# Altium PCB PCB1siste2.PcbDoc
Units mm, origin at the board's own origin, x right, y up, seen from the top; angles counter-clockwise.
Board outline 100.08 x 114.17 mm, 2 copper layers (Top Layer, Bottom Layer); 66 components, 150 nets, 492 pads, 0 vias.
Unrouted connection lines stored in the file: 264.
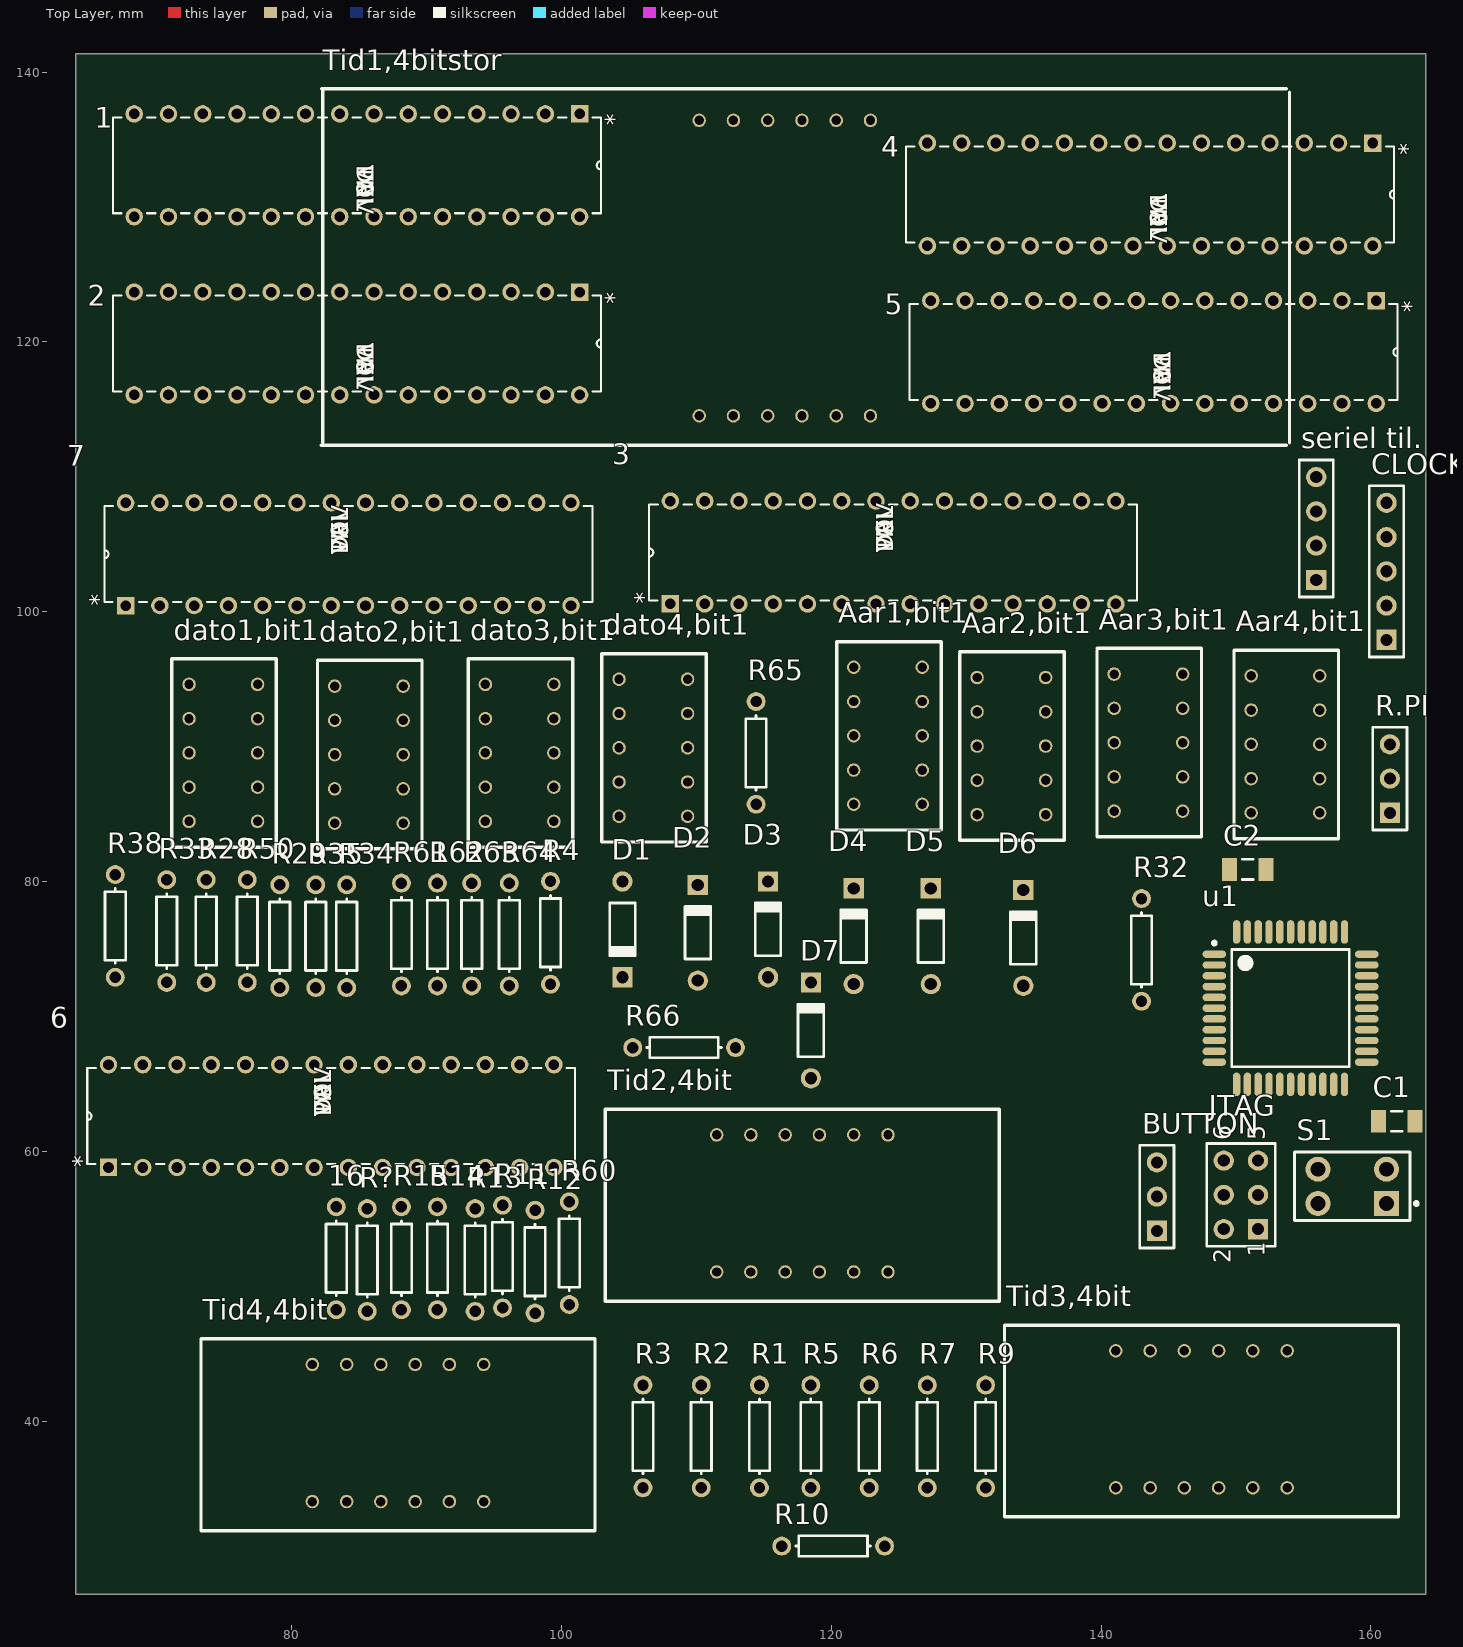
[diagram p0: Top Layer view]
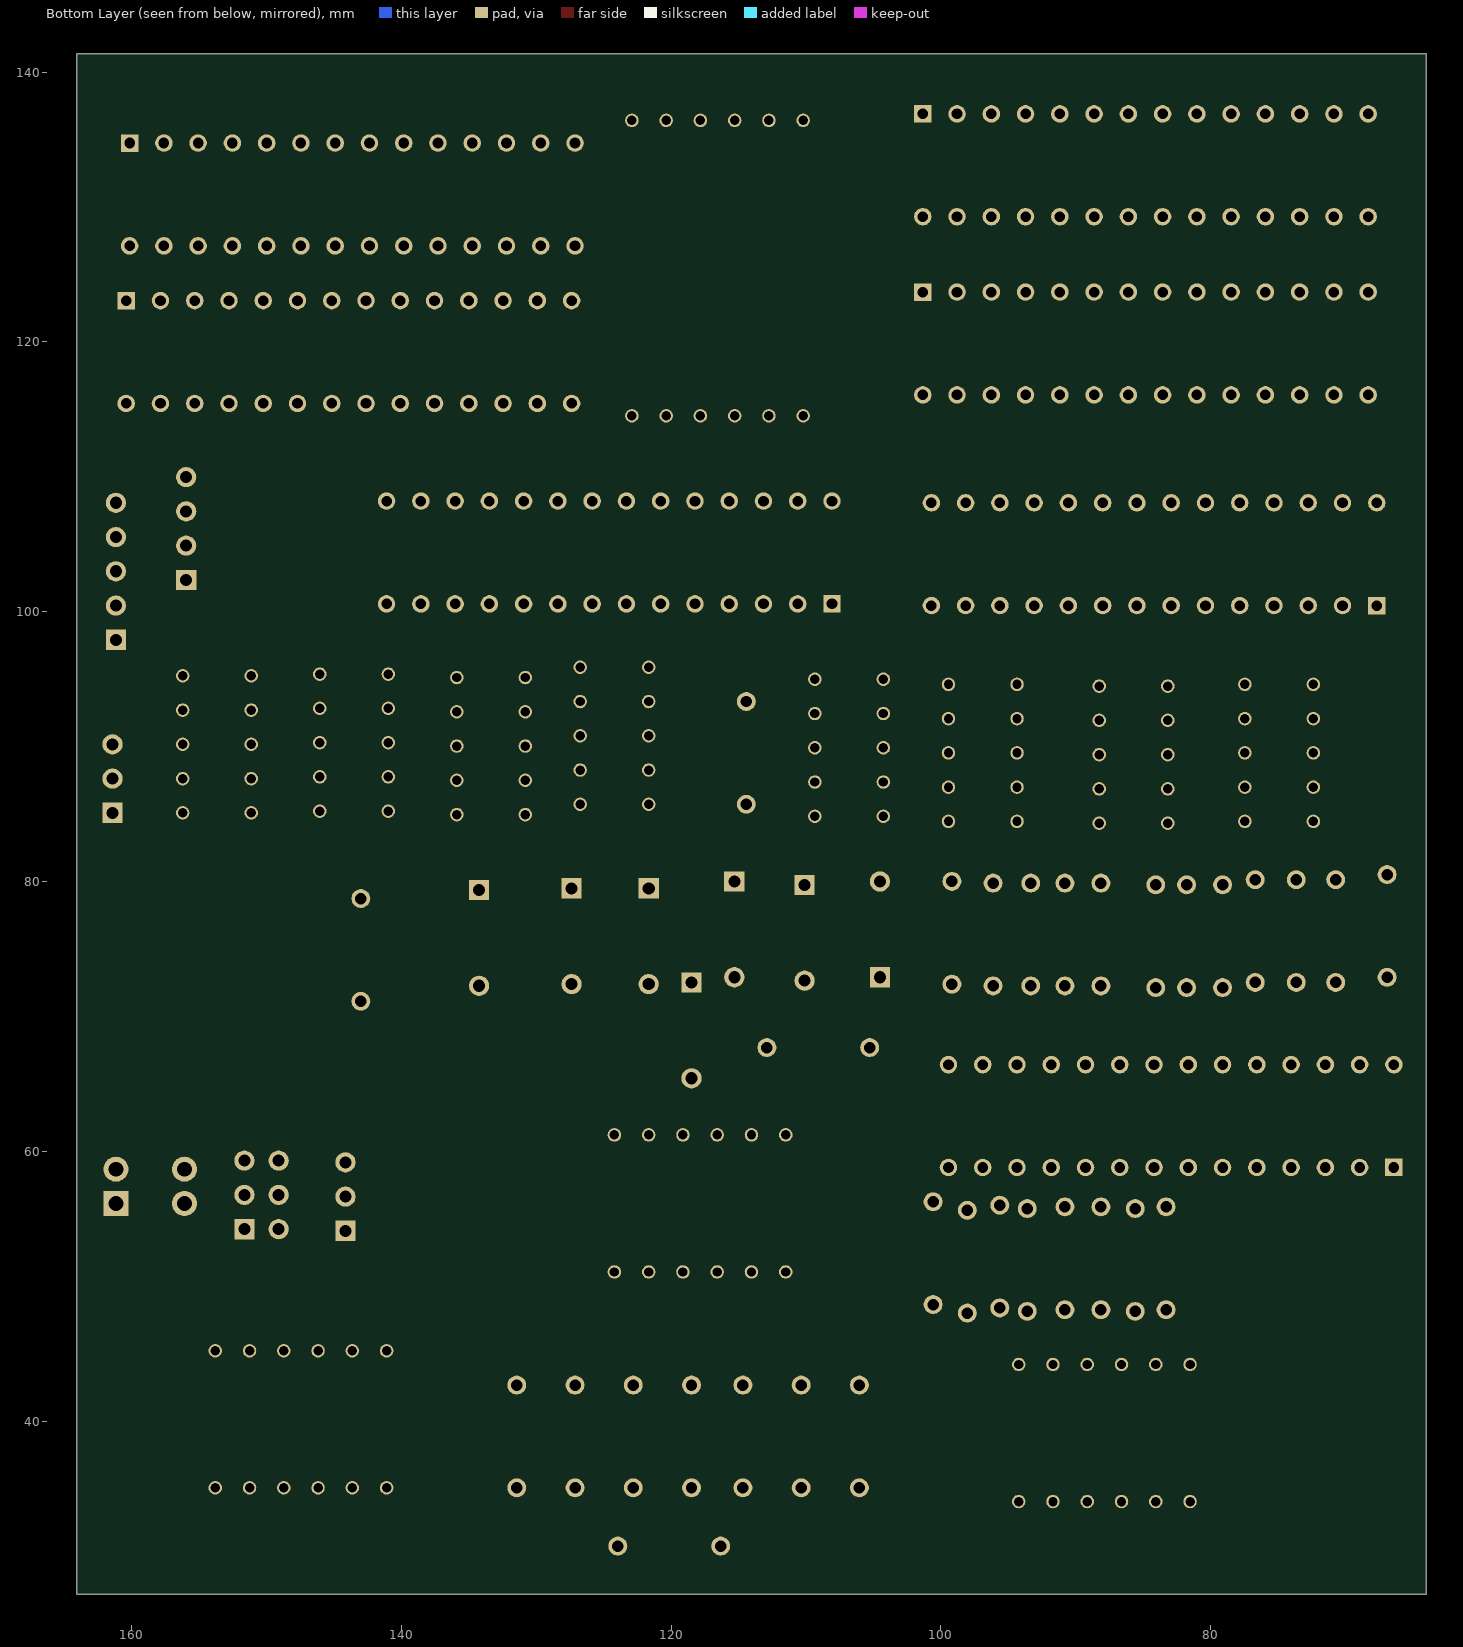
[diagram p1: Bottom Layer view, seen from below]

## Layer stack, top to bottom
Top Layer: signal copper 0.0356
Dielectric: dielectric 0.32, FR-4, Dk 4.8
Bottom Layer: signal copper 0.0356

## Board outline
64.008,141.351 164.084,141.351 164.084,27.178 64.008,27.178

## Design rules (kind name [scope] priority, off if disabled: settings)
Clearance [All] p1: gap=0.254
PolygonConnect [All] p1: connectstyle=Relief reliefconductorwidth=0.254 reliefentries=4 polygonreliefangle="90 Angle" airgapwidth=0.254
RoomDefinition skjemadisplay_siste2 [InComponentClass('skjemadisplay_siste2')] p1: confinementstyle=ConfineIn formatcopy=TRUE lockcomponents=FALSE outline 64.008,27.178 164.084,27.178 164.084,141.351 64.008,141.351
RoutingVias [All] p1: holewidth=0.711 width=1.27 viastyle="Through Hole" minholewidth=0.711 minwidth=1.27 maxholewidth=0.711 maxwidth=1.27
SolderMaskExpansion [All] p1: expansion=0.102
Width [All] p1: maxlimit=0.254 minlimit=0.254 preferedwidth=0.254
28 further rules are at their usual default settings.

## Components (designator, comment, footprint, x,y, rotation, side; value= is the part's Value field where it differs from the comment)
1 "TLC5940_NT_28" NT28 68.326,129.286 r270 top
2 "TLC5940_NT_28" NT28 68.326,116.078 r270 top
3 "TLC5940_NT_28" NT28 141.097,108.204 r90 top
4 "TLC5940_NT_28" NT28 127.127,127.127 r270 top
5 "TLC5940_NT_28" NT28 127.381,115.443 r270 top
6 "TLC5940_NT_28" NT28 99.441,66.421 r90 top
7 "TLC5940_NT_28" NT28 100.711,108.077 r90 top
16 "Res17" AXIAL-0.3 83.312,52.07 r90 top
Aar1,bit1 "schematic compo" Display1bit 104.521,83.82 r0 top
Aar2,bit1 "schematic compo" Display1bit 113.665,83.058 r0 top
Aar3,bit1 "schematic compo" Display1bit 123.825,83.312 r0 top
Aar4,bit1 "schematic compo" Display1bit 133.985,83.185 r0 top
BUTTON "Header 3" HDR1X3 144.145,54.102 r90 top
C1 "Cap Semi" C1206 161.925,62.23 r0 top
C2 "Cap Semi" C1206 150.876,80.899 r180 top
CLOCK "Header 5" HDR1X5 161.163,97.917 r90 top
D1 "Diode 1N914" DO-35 104.521,76.454 r270 top
D2 "Diode 1N914" DO-35 110.109,76.2 r90 top
D3 "Diode 1N914" DO-35 115.316,76.454 r90 top
D4 "Diode 1N914" DO-35 121.666,75.946 r90 top
D5 "Diode 1N914" DO-35 127.381,75.946 r90 top
D6 "Diode 1N914" DO-35 134.239,75.819 r90 top
D7 "Diode 1N914" DO-35 118.491,68.961 r90 top
dato1,bit1 "schematic compo" Display1bit 55.245,82.55 r0 top
dato2,bit1 "schematic compo" Display1bit 66.04,82.423 r0 top
dato3,bit1 "schematic compo" Display1bit 77.216,82.55 r0 top
dato4,bit1 "schematic compo" Display1bit 87.122,82.931 r0 top
JTAG "Header 3X2" HDR2X3 151.638,54.229 r90 top
R1 "Res1" AXIAL-0.3 114.681,38.862 r90 top
R2 "Res1" AXIAL-0.3 110.363,38.862 r90 top
R3 "Res1" AXIAL-0.3 106.045,38.862 r90 top
R4 "Res1" AXIAL-0.3 99.187,76.2 r90 top
R5 "Res1" AXIAL-0.3 118.491,38.862 r90 top
R6 "Res1" AXIAL-0.3 122.809,38.862 r90 top
R7 "Res1" AXIAL-0.3 127.127,38.862 r90 top
R9 "Res1" AXIAL-0.3 131.445,38.862 r90 top
R10 "Res1" AXIAL-0.3 120.142,30.734 r180 top
R11 "Res1" AXIAL-0.3 95.631,52.197 r90 top
R12 "Res1" AXIAL-0.3 98.044,51.816 r90 top
R13 "Res1" AXIAL-0.3 93.599,51.943 r90 top
R14 "Res1" AXIAL-0.3 90.805,52.07 r90 top
R15 "Res1" AXIAL-0.3 88.138,52.07 r90 top
R28 "Res1" AXIAL-0.3 73.66,76.327 r90 top
R29 "Res1" AXIAL-0.3 79.121,75.946 r90 top
R32 "Res1" AXIAL-0.3 143.002,74.93 r90 top
R33 "Res1" AXIAL-0.3 70.739,76.327 r90 top
R34 "Res1" AXIAL-0.3 84.074,75.946 r90 top
R35 "Res1" AXIAL-0.3 81.788,75.946 r90 top
R38 "Res1" AXIAL-0.3 66.929,76.708 r90 top
R50 "Res1" AXIAL-0.3 76.708,76.327 r90 top
R60 "Res1" AXIAL-0.3 100.584,52.451 r90 top
R61 "Res1" AXIAL-0.3 88.138,76.073 r90 top
R62 "Res1" AXIAL-0.3 90.805,76.073 r90 top
R63 "Res1" AXIAL-0.3 93.345,76.073 r90 top
R64 "Res1" AXIAL-0.3 96.139,76.073 r90 top
R65 "Res1" AXIAL-0.3 114.427,89.535 r90 top
R66 "Res1" AXIAL-0.3 109.093,67.691 r180 top
R.PI "Header 3" HDR1X3 161.417,85.09 r90 top
R? "Res1" AXIAL-0.3 85.598,51.943 r90 top
S1 "SW-DPST" DPST-4 158.623,57.404 r180 top
"seriel til." "Header 4" HDR1X4 155.956,102.362 r90 top
Tid1,4bitstor "4LEDdisplay" display 122.936,136.398 r180 top
Tid2,4bit "4LEDdisplay" PCBComponent_1 124.206,61.214 r180 top
Tid3,4bit "4LEDdisplay" PCBComponent_1 153.797,45.212 r180 top
Tid4,4bit "4LEDdisplay" PCBComponent_1 94.234,44.196 r180 top
u1 "ATmega32U4-AU" 44ML_N 154.051,70.612 r0 top

## Footprints (in the part's own frame and the unit in brackets; to place one, negate y for a bottom-side part, rotate by r counter-clockwise, add the part's x,y. Pads: shape width x height; smd on the part's side, far side on the other; paste and mask are expansions set on the pad)
44ML_N [mm] "Thin QFP, 44-Leads, Body 10x10mm, Pitch 0.8mm, IPC Medium Density"
  oval 1.75x0.55 smd: 1(-5.65,4) 2(-5.65,3.2) 3(-5.65,2.4) 4(-5.65,1.6) 5(-5.65,0.8) 6(-5.65,0) 7(-5.65,-0.8) 8(-5.65,-1.6) 9(-5.65,-2.4) 10(-5.65,-3.2) 11(-5.65,-4) 23(5.65,-4) 24(5.65,-3.2) 25(5.65,-2.4) 26(5.65,-1.6) 27(5.65,-0.8) 28(5.65,0) 29(5.65,0.8) 30(5.65,1.6) 31(5.65,2.4) 32(5.65,3.2) 33(5.65,4)
  oval 0.55x1.75 smd: 12(-4,-5.65) 13(-3.2,-5.65) 14(-2.4,-5.65) 15(-1.6,-5.65) 16(-0.8,-5.65) 17(0,-5.65) 18(0.8,-5.65) 19(1.6,-5.65) 20(2.4,-5.65) 21(3.2,-5.65) 22(4,-5.65) 34(4,5.65) 35(3.2,5.65) 36(2.4,5.65) 37(1.6,5.65) 38(0.8,5.65) 39(0,5.65) 40(-0.8,5.65) 41(-1.6,5.65) 42(-2.4,5.65) 43(-3.2,5.65) 44(-4,5.65)
  silkscreen extent -5.77,-4.35 4.35,4.95, body extent -5,-5 5,5, height 1.2
AXIAL-0.3 [mm] "Axial Device, Thru-Hole; 2 Leads; 0.3 in Pin Spacing"
  round 1.4 hole 0.85: 1(-3.81,0) 2(3.81,0)
  silkscreen extent -2.77,-0.76 2.77,0.76
C1206 [mm] "Chip Capacitor, Body 3.2x1.6mm, IPC High Density"
  rect 1.1x1.7 smd: 1(-1.35,0) 2(1.35,0)
  silkscreen extent -0.4,-0.75 0.4,0.75, body extent -1.7,-0.9 1.7,0.9, height 1.3
display [mm]
  round 1 hole 0.7: 1(0.025,-0.025) 1(0.025,-0.025) 1(0.025,-0.025) 2(2.565,-0.025) 3(5.105,-0.025) 4(7.645,-0.025) 5(10.185,-0.025) 6(12.725,-0.025) 7(0.025,21.875) 7(0.025,21.875) 8(2.565,21.875) 9(5.105,21.875) 10(7.645,21.875) 11(10.185,21.875) 12(12.725,21.875)
  silkscreen extent -31.04,-2.36 40.74,24.05
Display1bit [mm]
  round 1 hole 0.7: 1(17.145,12.065) 1(17.145,12.065) 2(17.145,9.525) 3(17.145,6.985) 4(17.145,4.445) 5(17.145,1.905) 6(22.225,12.065) 6(22.225,12.065) 7(22.225,9.525) 8(22.225,6.985) 9(22.225,4.445) 10(22.225,1.905)
  silkscreen extent 15.88,0 23.62,13.97
DO-35 [mm] "Diode, Axial; Body 3.8 x 1.9 mm (LxDia. max), Lead Dia. 0.53 mm (max)"
  round 1.5 hole 0.9: 1(-3.55,0)
  rect 1.5x1.5 hole 0.9: 2(3.55,0)
  silkscreen extent -1.95,-0.95 2.05,0.95
DPST-4 [mm] "Switch; 4 Leads"
  rect 1.85x1.85 hole 1.1: 1(-2.54,1.27)
  round 1.85 hole 1.1: 2(-2.54,-1.27) 3(2.54,-1.27) 4(2.54,1.27)
  silkscreen extent -4.88,-2.54 4.28,2.54
HDR1X3 [mm] "Connector; Header; 3 Position"
  rect 1.5x1.5 hole 0.9: 1(0,0)
  round 1.5 hole 0.9: 2(2.54,0) 3(5.08,0)
  silkscreen extent -1.27,-1.27 6.35,1.27
HDR1X4 [mm] "Connector; Header; 4 Position"
  rect 1.5x1.5 hole 0.9: 1(0,0)
  round 1.5 hole 0.9: 2(2.54,0) 3(5.08,0) 4(7.62,0)
  silkscreen extent -1.27,-1.27 8.89,1.27
HDR1X5 [mm] "Connector; Header; 5 Position"
  rect 1.5x1.5 hole 0.9: 1(0,0)
  round 1.5 hole 0.9: 2(2.54,0) 3(5.08,0) 4(7.62,0) 5(10.16,0)
  silkscreen extent -1.27,-1.27 11.43,1.27
HDR2X3 [mm] "Connector; Header; 3x2 Position"
  rect 1.5x1.5 hole 0.9: 1(0,0)
  round 1.5 hole 0.9: 2(0,2.54) 3(2.54,0) 4(2.54,2.54) 5(5.08,0) 6(5.08,2.54)
  silkscreen extent -1.27,-1.27 6.35,3.81
NT28 [mil]
  rect 51x51 / inner round 60 / far side rect 51x51 hole 31: 1(-300,1300)
  round 51 / inner round 60 / far side round 51 hole 31: 2(-300,1200) 3(-300,1100) 4(-300,1000) 5(-300,900) 6(-300,800) 7(-300,700) 8(-300,600) 9(-300,500) 10(-300,400) 11(-300,300) 12(-300,200) 13(-300,100) 14(-300,0) 15(0,0) 16(0,100) 17(0,200) 18(0,300) 19(0,400) 20(0,500) 21(0,600) 22(0,700) 23(0,800) 24(0,900) 25(0,1000) 26(0,1100) 27(0,1200) 28(0,1300)
  silkscreen extent -290,-62 -10,1362
PCBComponent_1 [mm]
  round 1 hole 0.7: 1(0,0) 2(2.54,0) 3(5.08,0) 4(7.62,0) 5(10.16,0) 6(12.7,0) 7(0,10.16) 8(2.54,10.16) 9(5.08,10.16) 10(7.62,10.16) 11(10.16,10.16) 12(12.7,10.16)
  silkscreen extent -8.26,-1.91 20.95,12.32

## Part data
1 2 3 4 5 6 7: "Imported"
16: library part Res1, "Resistor"
Aar1,bit1 Aar2,bit1 Aar3,bit1 Aar4,bit1 dato1,bit1 dato2,bit1 dato3,bit1 dato4,bit1: library part display, "7segment leddisplay"
BUTTON R.PI: "Header, 3-Pin"
C1 C2: "Capacitor (Semiconductor SIM Model)"
CLOCK: "Header, 5-Pin"
D1 D2 D3 D4 D5 D6 D7: "High Conductance Fast Diode"
JTAG: "Header, 3-Pin, Dual row"
R1 R2 R3 R4 R5 R6 R7 R9 R10 R11 R12 R13 R14 R15 R28 R29 R32 R33 R34 R35 R38 R50 R60 R61 R62 R63 R64 R65 R66 R?: "Resistor"
S1: "Double-Pole, Single-Throw Switch"
"seriel til.": "Header, 4-Pin"
Tid1,4bitstor Tid2,4bit Tid3,4bit Tid4,4bit: "4LEDdisplay 7 segment"
u1: "8-bit AVR Microcontroller, 2.7-5.5V, 32KB Flash, 2.5KB EEPROM, 1KB SRAM, USB Controller, 44-pin TQFP, Industrial Grade (-40°C to 85°C)"

## Nets (pads, with @x,y where several pads share a name; then routed paths per layer and width w, separated by ;. In a path a pad name is that pad's centre, name@x,y a point inside that pad or via, vN(x,y) a via of type N, cw(c..) or ccw(c..) an arc to the next point about the centre after c; other vN are vias at no path point)
ADC: CLOCK.1 u1.25
BLANK: 1.23 2.23 3.23 4.23 5.23 6.23 7.23 u1.30
GND: 1.22 1.27 2.22 2.27 3.22 3.27 4.22 4.27 5.22 5.27 6.22 6.27 7.22 7.27 "seriel til..2" BUTTON.3 C2.1 CLOCK.5 D1.2 D2.2 D3.2 D4.2 D5.2 D6.2 D7.2 JTAG.1 R28.2 R29.2 R32.2 R33.2 R34.2 R35.2 R38.2 R50.2 R.PI.1 u1.3 u1.4 u1.7 u1.15 u1.23 u1.35 u1.42 u1.43
GSCK: 1.18 2.18 3.18 4.18 5.18 6.18 7.18 u1.31
"I/O BUTTON": BUTTON.1 u1.32
Net1_1: 1.1 Tid1,4bitstor.2
Net1_2: 1.2 Tid1,4bitstor.6
Net1_3: 1.3 Tid1,4bitstor.10
Net1_4: 1.4 Tid1,4bitstor.8
Net1_5: 1.5 Tid1,4bitstor.7
Net1_6: 1.6 Tid1,4bitstor.3
Net1_7: 1.7 Tid1,4bitstor.11
Net1_8: 1.8 dato1,bit1.10
Net1_9: 1.9 dato1,bit1.9
Net1_10: 1.10 dato1,bit1.8
Net1_11: 1.11 dato1,bit1.5
Net1_12: 1.12 dato1,bit1.4
Net1_13: 1.13 dato1,bit1.2
Net1_14: 1.14 dato1,bit1.3
Net1_17: 1.17 2.26
Net1_20: 1.20 R38.1
Net2_1: 2.1 dato2,bit1.10
Net2_2: 2.2 dato2,bit1.9
Net2_3: 2.3 dato2,bit1.8
Net2_4: 2.4 dato2,bit1.5
Net2_5: 2.5 dato2,bit1.4
Net2_6: 2.6 dato2,bit1.2
Net2_7: 2.7 dato2,bit1.3
Net2_8: 2.8 dato3,bit1.10
Net2_9: 2.9 dato3,bit1.9
Net2_10: 2.10 dato3,bit1.8
Net2_11: 2.11 dato3,bit1.5
Net2_12: 2.12 dato3,bit1.4
Net2_13: 2.13 dato3,bit1.2
Net2_14: 2.14 dato3,bit1.3
Net2_17: 2.17 3.26
Net2_20: 2.20 R33.1
Net3_1: 3.1 dato4,bit1.10
Net3_2: 3.2 dato4,bit1.9
Net3_3: 3.3 dato4,bit1.8
Net3_4: 3.4 dato4,bit1.5
Net3_5: 3.5 dato4,bit1.4
Net3_6: 3.6 dato4,bit1.2
Net3_7: 3.7 dato4,bit1.3
Net3_8: 3.8 Aar1,bit1.10
Net3_9: 3.9 Aar1,bit1.9
Net3_10: 3.10 Aar1,bit1.8
Net3_11: 3.11 Aar1,bit1.5
Net3_12: 3.12 Aar1,bit1.4
Net3_13: 3.13 Aar1,bit1.2
Net3_14: 3.14 Aar1,bit1.3
Net3_17: 3.17 7.26
Net3_20: 3.20 R28.1
Net4_1: 4.1 Aar2,bit1.10
Net4_2: 4.2 Aar2,bit1.9
Net4_3: 4.3 Aar2,bit1.8
Net4_4: 4.4 Aar2,bit1.5
Net4_5: 4.5 Aar2,bit1.4
Net4_6: 4.6 Aar2,bit1.2
Net4_7: 4.7 Aar2,bit1.3
Net4_8: 4.8 Aar3,bit1.10
Net4_9: 4.9 Aar3,bit1.9
Net4_10: 4.10 Aar3,bit1.8
Net4_11: 4.11 Aar3,bit1.5
Net4_12: 4.12 Aar3,bit1.4
Net4_13: 4.13 Aar3,bit1.2
Net4_14: 4.14 Aar3,bit1.3
Net4_20: 4.20 R29.1
Net4_26: 4.26 5.17
Net5_1: 5.1 Aar4,bit1.10
Net5_2: 5.2 Aar4,bit1.9
Net5_3: 5.3 Aar4,bit1.8
Net5_4: 5.4 Aar4,bit1.5
Net5_5: 5.5 Aar4,bit1.4
Net5_6: 5.6 Aar4,bit1.2
Net5_7: 5.7 Aar4,bit1.3
Net5_8: 5.8 Tid2,4bit.2
Net5_9: 5.9 Tid2,4bit.6
Net5_10: 5.10 Tid2,4bit.10
Net5_11: 5.11 Tid2,4bit.8
Net5_12: 5.12 Tid2,4bit.7
Net5_13: 5.13 Tid2,4bit.3
Net5_14: 5.14 Tid2,4bit.11
Net5_20: 5.20 R35.1
Net5_26: 5.26 6.17
Net6_1: 6.1 Tid3,4bit.2
Net6_2: 6.2 Tid3,4bit.6
Net6_3: 6.3 Tid3,4bit.10
Net6_4: 6.4 Tid3,4bit.8
Net6_5: 6.5 Tid3,4bit.7
Net6_6: 6.6 Tid3,4bit.3
Net6_7: 6.7 Tid3,4bit.11
Net6_8: 6.8 Tid4,4bit.2
Net6_9: 6.9 Tid4,4bit.6
Net6_10: 6.10 Tid4,4bit.10
Net6_11: 6.11 Tid4,4bit.8
Net6_12: 6.12 Tid4,4bit.7
Net6_13: 6.13 Tid4,4bit.3
Net6_14: 6.14 Tid4,4bit.11
Net6_20: 6.20 R34.1
Net7_1: 7.1 R60.2
Net7_2: 7.2 R61.2
Net7_3: 7.3 R62.2
Net7_4: 7.4 R63.2
Net7_5: 7.5 R64.2
Net7_6: 7.6 R65.2
Net7_11: 7.11 R66.2
Net7_20: 7.20 R50.1
Net16_2: 16.2 Tid2,4bit.12 Tid3,4bit.12 Tid4,4bit.12
NetAar1,bit1_1: Aar1,bit1.1 R10.2
NetAar2,bit1_1: Aar2,bit1.1 R11.2
NetAar3,bit1_1: Aar3,bit1.1 R12.2
NetAar4,bit1_1: Aar4,bit1.1 R13.2
NetC1_1: C1.1 R32.1 S1.1 S1.3 u1.13
NetD1_1: D1.1 R60.1
NetD2_1: D2.1 R61.1
NetD3_1: D3.1 R62.1
NetD4_1: D4.1 R63.1
NetD5_1: D5.1 R64.1
NetD6_1: D6.1 R65.1
NetD7_1: D7.1 R66.1
Netdato1,bit1_1: dato1,bit1.1 R5.2
Netdato2,bit1_1: dato2,bit1.1 R6.2
Netdato3,bit1_1: dato3,bit1.1 R7.2
Netdato4,bit1_1: dato4,bit1.1 R9.2
NetR1_2: R1.2 Tid1,4bitstor.12
NetR2_2: R2.2 Tid1,4bitstor.5
NetR3_2: R3.2 Tid1,4bitstor.4
NetR4_2: R4.2 Tid1,4bitstor.1
NetR14_2: R14.2 Tid2,4bit.1 Tid3,4bit.1 Tid4,4bit.1
NetR15_2: R15.2 Tid2,4bit.4 Tid3,4bit.4 Tid4,4bit.4
NetR?_2: R?.2 Tid2,4bit.5 Tid3,4bit.5 Tid4,4bit.5
Netu1_16: u1.16 u1.17
"PWM 1": R1.1 u1.41
"PWM 2": R2.1 u1.40
"PWM 3": JTAG.6 R3.1 u1.39
"PWM 4": JTAG.4 R4.1 u1.38
"PWM 5": JTAG.3 R14.1 u1.37
"PWM 6": JTAG.5 R15.1 u1.36
"PWM 7": R?.1 u1.33
"PWM 8": 16.1 u1.1
RX: "seriel til..3" u1.20
SCK: 1.25 2.25 3.25 4.25 5.25 6.25 7.25 u1.9
SCL: CLOCK.2 R.PI.2 u1.18
SDA: CLOCK.3 R.PI.3 u1.19
SIN: 1.26 u1.10
SOUT: 6.26 7.17
TX: "seriel til..4" u1.21
VCC: 1.19 1.21 2.19 2.21 3.19 3.21 4.19 4.21 5.19 5.21 6.19 6.21 7.19 7.21 "seriel til..1" BUTTON.2 C1.2 C2.2 CLOCK.4 JTAG.2 R5.1 R6.1 R7.1 R9.1 R10.1 R11.1 R12.1 R13.1 S1.2 S1.4 u1.14 u1.24 u1.34 u1.44
XLAT: 1.24 2.24 3.24 4.24 5.24 6.24 7.24 u1.29
pads on no net: 1.15 1.16 1.28 2.15 2.16 2.28 3.15 3.16 3.28 4.15 4.16 4.17 4.28 5.15 5.16 5.28 6.15 6.16 6.28 7.7 7.8 7.9 7.10 7.12 7.13 7.14 7.15 7.16 7.28 Aar1,bit1.6 Aar1,bit1.7 Aar2,bit1.6 Aar2,bit1.7 Aar3,bit1.6 Aar3,bit1.7 Aar4,bit1.6 Aar4,bit1.7 dato1,bit1.6 dato1,bit1.7 dato2,bit1.6 dato2,bit1.7 dato3,bit1.6 dato3,bit1.7 dato4,bit1.6 dato4,bit1.7 Tid1,4bitstor.9 Tid2,4bit.9 Tid3,4bit.9 Tid4,4bit.9 u1.2 u1.5 u1.6 u1.8 u1.11 u1.12 u1.22 u1.26 u1.27 u1.28

## Text inside footprints (layer, text, board x,y; h text height)
1: Top Overlay "TOL" at 84.836,133.096 h1.27 r270; Top Overlay "VAL" at 84.836,133.096 h1.27 r270; Top Overlay "DEV" at 84.836,133.096 h1.27 r270; Top Overlay "PN" at 84.836,133.096 h1.27 r270; Top Overlay "*" at 102.743,136.906 h1.27 r270; Mechanical 1 "RefDes2" at 84.836,133.096 h1.27 r270; Mechanical 1 "*" at 102.743,136.906 h1.27 r270
2: Top Overlay "TOL" at 84.836,119.888 h1.27 r270; Top Overlay "VAL" at 84.836,119.888 h1.27 r270; Top Overlay "DEV" at 84.836,119.888 h1.27 r270; Top Overlay "PN" at 84.836,119.888 h1.27 r270; Top Overlay "*" at 102.743,123.698 h1.27 r270; Mechanical 1 "RefDes2" at 84.836,119.888 h1.27 r270; Mechanical 1 "*" at 102.743,123.698 h1.27 r270
3: Top Overlay "TOL" at 124.587,104.394 h1.27 r90; Top Overlay "VAL" at 124.587,104.394 h1.27 r90; Top Overlay "DEV" at 124.587,104.394 h1.27 r90; Top Overlay "PN" at 124.587,104.394 h1.27 r90; Top Overlay "*" at 106.68,100.584 h1.27 r90; Mechanical 1 "RefDes2" at 124.587,104.394 h1.27 r90; Mechanical 1 "*" at 106.68,100.584 h1.27 r90
4: Top Overlay "TOL" at 143.637,130.937 h1.27 r270; Top Overlay "VAL" at 143.637,130.937 h1.27 r270; Top Overlay "DEV" at 143.637,130.937 h1.27 r270; Top Overlay "PN" at 143.637,130.937 h1.27 r270; Top Overlay "*" at 161.544,134.747 h1.27 r270; Mechanical 1 "RefDes2" at 143.637,130.937 h1.27 r270; Mechanical 1 "*" at 161.544,134.747 h1.27 r270
5: Top Overlay "TOL" at 143.891,119.253 h1.27 r270; Top Overlay "VAL" at 143.891,119.253 h1.27 r270; Top Overlay "DEV" at 143.891,119.253 h1.27 r270; Top Overlay "PN" at 143.891,119.253 h1.27 r270; Top Overlay "*" at 161.798,123.063 h1.27 r270; Mechanical 1 "RefDes2" at 143.891,119.253 h1.27 r270; Mechanical 1 "*" at 161.798,123.063 h1.27 r270
6: Top Overlay "TOL" at 82.931,62.611 h1.27 r90; Top Overlay "VAL" at 82.931,62.611 h1.27 r90; Top Overlay "DEV" at 82.931,62.611 h1.27 r90; Top Overlay "PN" at 82.931,62.611 h1.27 r90; Top Overlay "*" at 65.024,58.801 h1.27 r90; Mechanical 1 "RefDes2" at 82.931,62.611 h1.27 r90; Mechanical 1 "*" at 65.024,58.801 h1.27 r90
7: Top Overlay "TOL" at 84.201,104.267 h1.27 r90; Top Overlay "VAL" at 84.201,104.267 h1.27 r90; Top Overlay "DEV" at 84.201,104.267 h1.27 r90; Top Overlay "PN" at 84.201,104.267 h1.27 r90; Top Overlay "*" at 66.294,100.457 h1.27 r90; Mechanical 1 "RefDes2" at 84.201,104.267 h1.27 r90; Mechanical 1 "*" at 66.294,100.457 h1.27 r90
JTAG: Top Overlay "6" at 149.606,60.833 h1.27 r90; Top Overlay "5" at 152.146,60.833 h1.27 r90; Top Overlay "2" at 149.606,51.689 h1.27 r90; Top Overlay "1" at 152.146,52.197 h1.27 r90